# EAGLE board ece411_t2_schematic_11_15 (EAGLE 9.5.2)
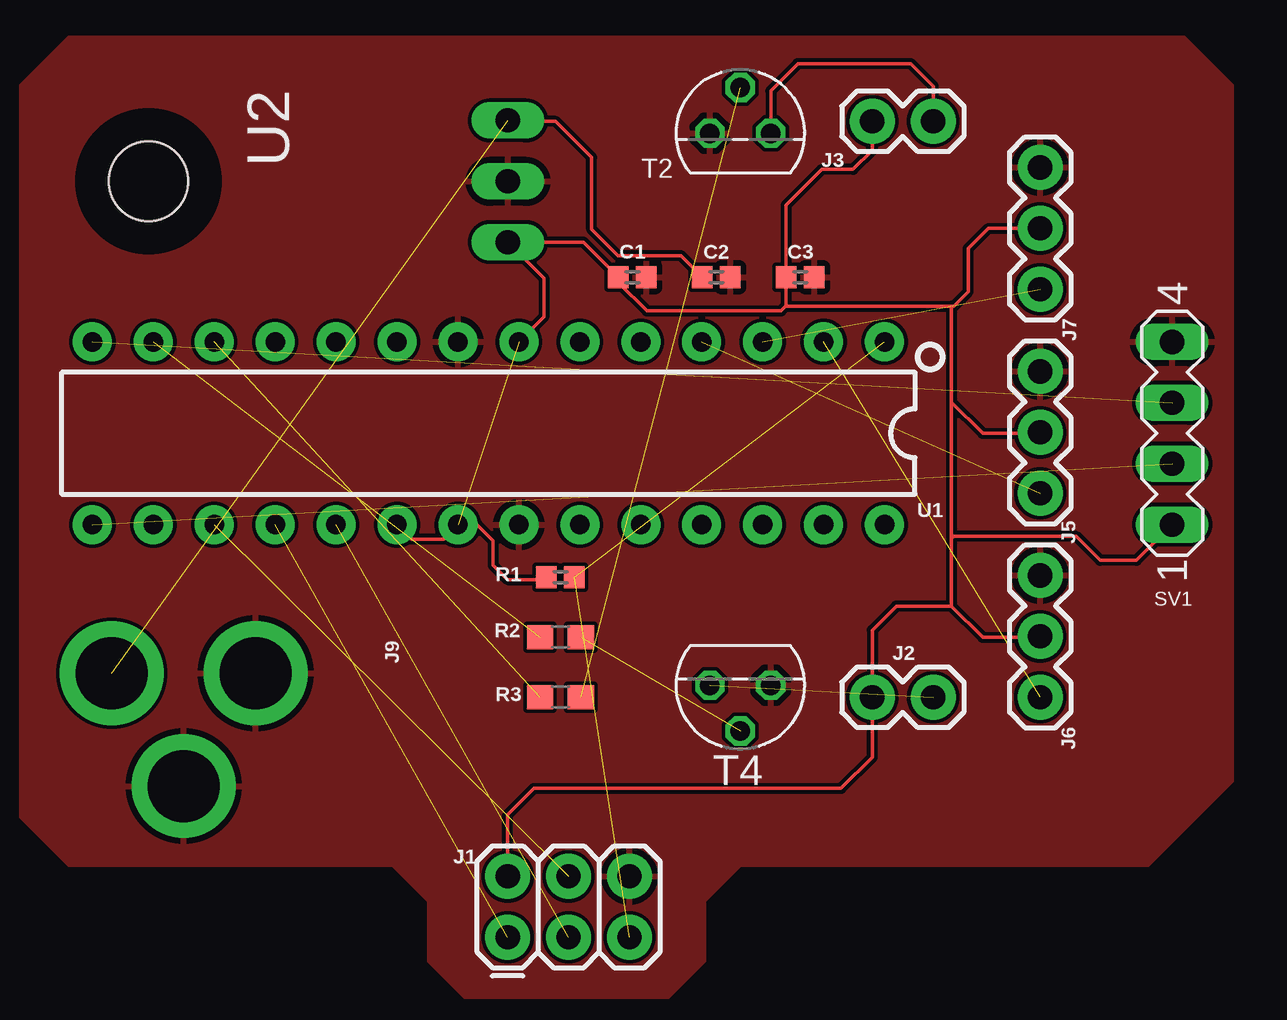
[diagram p0: board, top side]
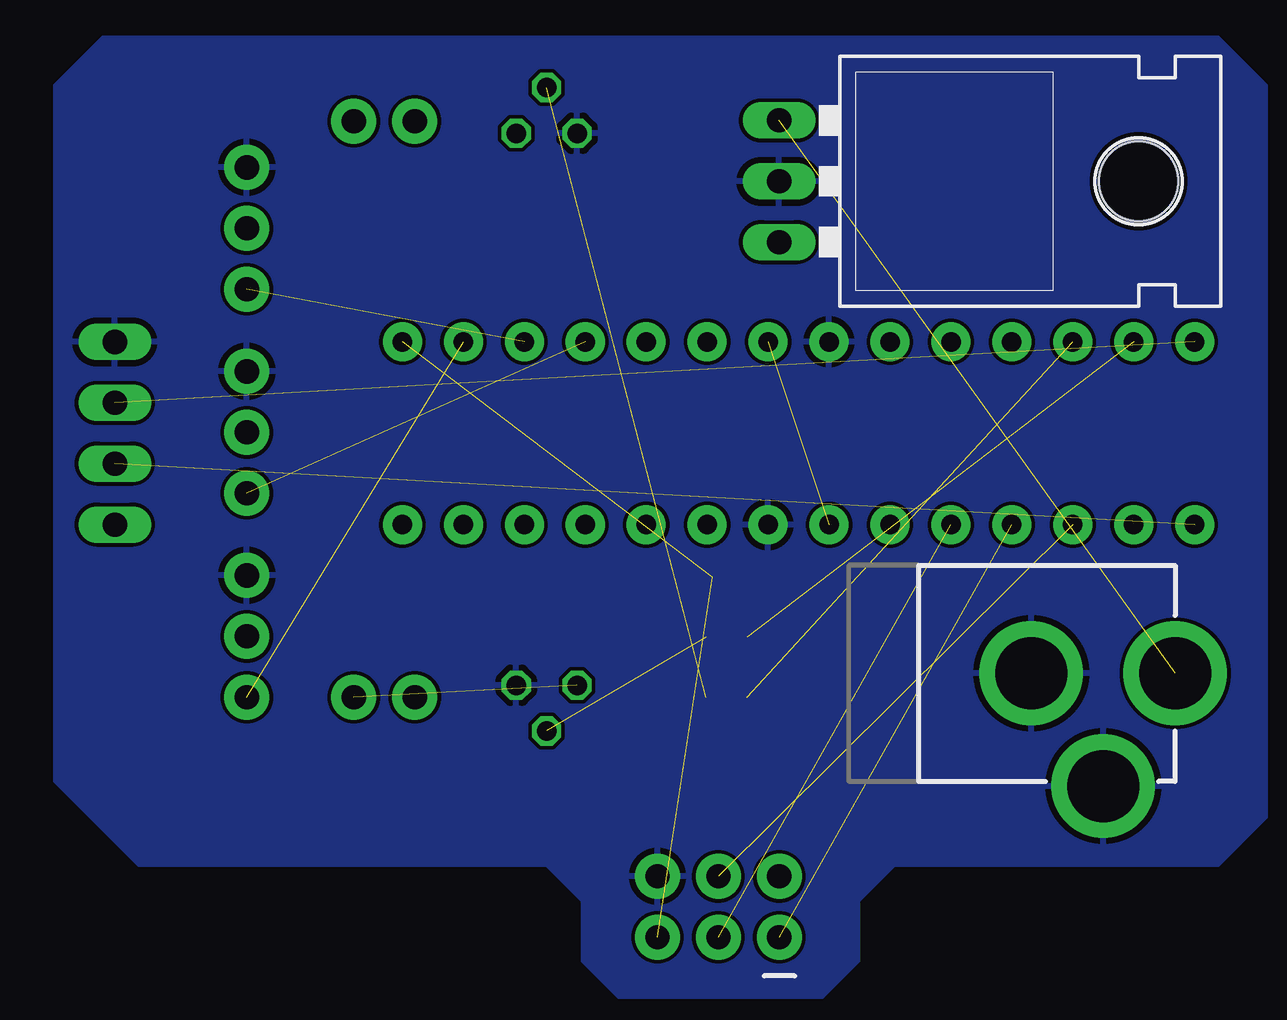
[diagram p1: board, bottom side, seen from below]

No outline drawn. Coordinates in mm, seen from the top.
Copper layers (1*16): Top 0.035559375mm / dielectric 1.6mm / Bottom 0.035559375mm
Design rules "oshpark-2layer": minimum track width 6mil, minimum drill 10mil, track to track 6mil, track to pad 6mil, pad to pad 6mil, via to via 6mil, smd to smd 6mil, copper to edge 15mil, drill to drill 6mil, minimum pad ring 5mil, minimum via ring 5mil, stop-mask expansion 2.5mil, vias tented up to drill 0mil, thermal gap 10mil

## Footprints (pad centres in the part's own frame; a part is rotated, then mirrored left to right if it is on the bottom)
0402 = smd 0.85 x 0.9: 1 -0.58,0; 2 0.58,0
2X3 = drill 1.016 pad 1.88: 1 0,0; 2 0,2.54; 3 2.54,0; 4 2.54,2.54; 5 5.08,0; 6 5.08,2.54
1X02 = drill 1.016 pad 1.88: 1 0,0; 2 2.54,0
1X03 = drill 1.016 pad 1.88: 1 0,0; 2 2.54,0; 3 5.08,0
POWER_JACK_PTH = drill 2.997 pad 4.318: GND 0,7.7; GNDBREAK 4.7,10.7; PWR 0,13.7
0603 = smd 1.1 x 1: 1 -0.85,0; 2 0.85,0
MA04-1 = drill 1.016 long: 1 -3.81,0; 2 -1.27,0; 3 1.27,0; 4 3.81,0
TO92 = drill 0.813 octagon: 1 1.27,0; 2 0,1.905; 3 -1.27,0
DIP28 = drill 0.813 pad 1.626: 1 -16.51,-3.81; 2 -13.97,-3.81; 3 -11.43,-3.81; 4 -8.89,-3.81; 5 -6.35,-3.81; 6 -3.81,-3.81; 7 -1.27,-3.81; 8 1.27,-3.81; 9 3.81,-3.81; 10 6.35,-3.81; 11 8.89,-3.81; 12 11.43,-3.81; 13 13.97,-3.81; 14 16.51,-3.81; 15 16.51,3.81; 16 13.97,3.81; 17 11.43,3.81; 18 8.89,3.81; 19 6.35,3.81; 20 3.81,3.81; 21 1.27,3.81; 22 -1.27,3.81; 23 -3.81,3.81; 24 -6.35,3.81; 25 -8.89,3.81; 26 -11.43,3.81; 27 -13.97,3.81; 28 -16.51,3.81
TO-220-ALT = drill 1.016 long: GND 0,-3.81; IN -2.54,-3.81; OUT 2.54,-3.81 | hole 3.302: 0,11.176

## Placement (x,y rotation side)
C1  0.1uF  [0402]  57,43 0 top
C2  0.1uF  [0402]  60.5,43 0 top
C3  0.1uF  [0402]  64,43 0 top
J1  AVR_SPI_PROG_3X2PTH  [2X3]  51.8,15.5 0 top
J2  Right Motor  [1X02]  67,25.5 0 top
J3  Left Motor  [1X02]  67,49.5 0 top
J5  455-1750-1-ND  [1X03]  74,34 90 top
J6  455-1750-1-ND  [1X03]  74,25.5 90 top
J7  455-1750-1-ND  [1X03]  74,42.5 90 top
J9  POWER_JACK  [POWER_JACK_PTH]  49,26.5 270 bottom
R1  10k  [0402]  54,30.5 0 top
R2  2.2k  [0603]  54,28 0 top
R3  2.2k  [0603]  54,25.5 0 top
SV1  HC-SR04  [MA04-1]  79.5,36.5 90 top
T2  2N3904  [TO92]  61.5,49 0 top
T4  2N3904  [TO92]  61.5,26 180 top
U1  328P  [DIP28]  51,36.5 180 top
U2  LM7805  [TO-220-ALT]  48,47 270 bottom

## Library data of the parts
C1-C3 = SparkFun-Capacitors; PROD_ID: CAP-14993
J1 = SparkFun-Connectors
J2 J3 = SparkFun-Retired
J5-J7 = SparkFun-Connectors; PROD_ID: XXX-00000
J9 = SparkFun-Connectors; PROD_ID: CONN-08197
R1 = SparkFun-Resistors; PROD_ID: RES-14241
R2 R3 = SparkFun-Resistors; PROD_ID: RES-08272
SV1 = con-lstb; OC_FARNELL: unknown; OC_NEWARK: unknown
T2 T4 = transistor
U1 = SparkFun-IC-Microcontroller; PROD_ID: IC-09136
U2 = SparkFun-IC-Power; PROD_ID: VREG-08450; SF_ID: COM-00107

## Nets
GND: C1.2 C2.2 C3.2 J1.6 J5.3 J6.3 J7.3 J9.GND J9.GNDBREAK SV1.4 T2.3 T4.3 U1.8 U1.22 U2.GND
MOSI: J1.4 U1.17
N$1: R3.1 U1.12
N$2: J3.2 T2.1
N$3: R2.2 T4.2
N$4: R3.2 T2.2
N$5: J1.1 U1.18
N$6: J2.2 T4.1
N$7: J5.1 U1.4
N$8: J7.1 U1.3
N$9: J6.1 U1.2
N$10: J1.5 R1.2 U1.1
N$11: SV1.2 U1.15
N$12: SV1.3 U1.14
N$15: R2.1 U1.13
SCK: J1.3 U1.19
VCC: C1.1 C3.1 J1.2 J2.1 J3.1 J5.2 J6.2 J7.2 R1.1 SV1.1 U1.7 U1.20 U1.21 U2.OUT
VIN: C2.1 J9.PWR U2.IN

## Tracks (layer width: path | path; a pad name or v marks a point on that pad's centre or on a via)
GND
  pour Top: 33.5,53 80,53 82,51 82,22 78.5,18.5 61.5,18.5 60,17 60,14.5 58.5,13 50,13 48.5,14.5 48.5,17 47,18.5 33.5,18.5 31.5,20.5 31.5,51
  pour Bottom: 31.5,51 33.5,53 80,53 82,51 82,22 78.5,18.5 61.5,18.5 60,17 60,14.5 58.5,13 50,13 48.5,14.5 48.5,17 47,18.5 33.5,18.5 31.5,20.5
MOSI  (1 unrouted)
N$1  (1 unrouted)
N$2
  Top 0.152: J3.2 69.54,50.96 68.6,51.9 63.9,51.9 62.77,50.77 T2.1
N$3  (1 unrouted)
N$4  (1 unrouted)
N$5  (1 unrouted)
N$6  (1 unrouted)
N$7  (1 unrouted)
N$8  (1 unrouted)
N$9  (1 unrouted)
N$10  (2 unrouted)
N$11  (1 unrouted)
N$12  (1 unrouted)
N$15  (1 unrouted)
SCK  (1 unrouted)
VCC  (1 unrouted)
  Top 0.152: R1.1 53.32,30.4 51.8,30.4 51.2,31 51.2,32.02 50.53,32.69 U1.21 49.13,32.09 47.79,32.09 U1.20 | C3.1 | C3.1 63.36,42.94 63.36,42.74 | J3.1 67,48.3 66.2,47.5 64.9,47.5 63.41,46.01 C3.1 | U1.7 53.31,41.35 53.31,42.96 U2.OUT 54.96,44.46 C1.1 56.42,42.78 57.6,41.6 63.2,41.6 63.41,41.81 | C3.1 63.41,41.81 | 63.41,41.81 63.42,41.8 70.3,41.8 | 70.3,41.8 70.4,41.8 71,42.4 71,44.2 71.84,45.04 J7.2 | J5.2 73.96,36.5 71.6,36.5 70.3,37.8 | 70.3,41.8 70.3,37.8 | J6.2 73.96,28 71.6,28 70.3,29.3 | 70.3,37.8 70.3,32.1 | 70.3,32.1 70.3,29.3 | 70.3,29.3 68,29.3 67,28.3 J2.1 67,23 65.7,21.7 52.9,21.7 51.8,20.6 J1.2 | SV1.1 78.01,31.2 76.5,31.2 75.5,32.2 70.4,32.2 70.3,32.1
VIN  (1 unrouted)
  Top 0.152: C2.1 59.02,43.9 56.4,43.9 55.3,45 55.3,48 53.8,49.5 51.85,49.5 U2.IN